# EAGLE board RFM69HCW_BOB-Panel-v10 (EAGLE 6.5.0), part 1 of 2
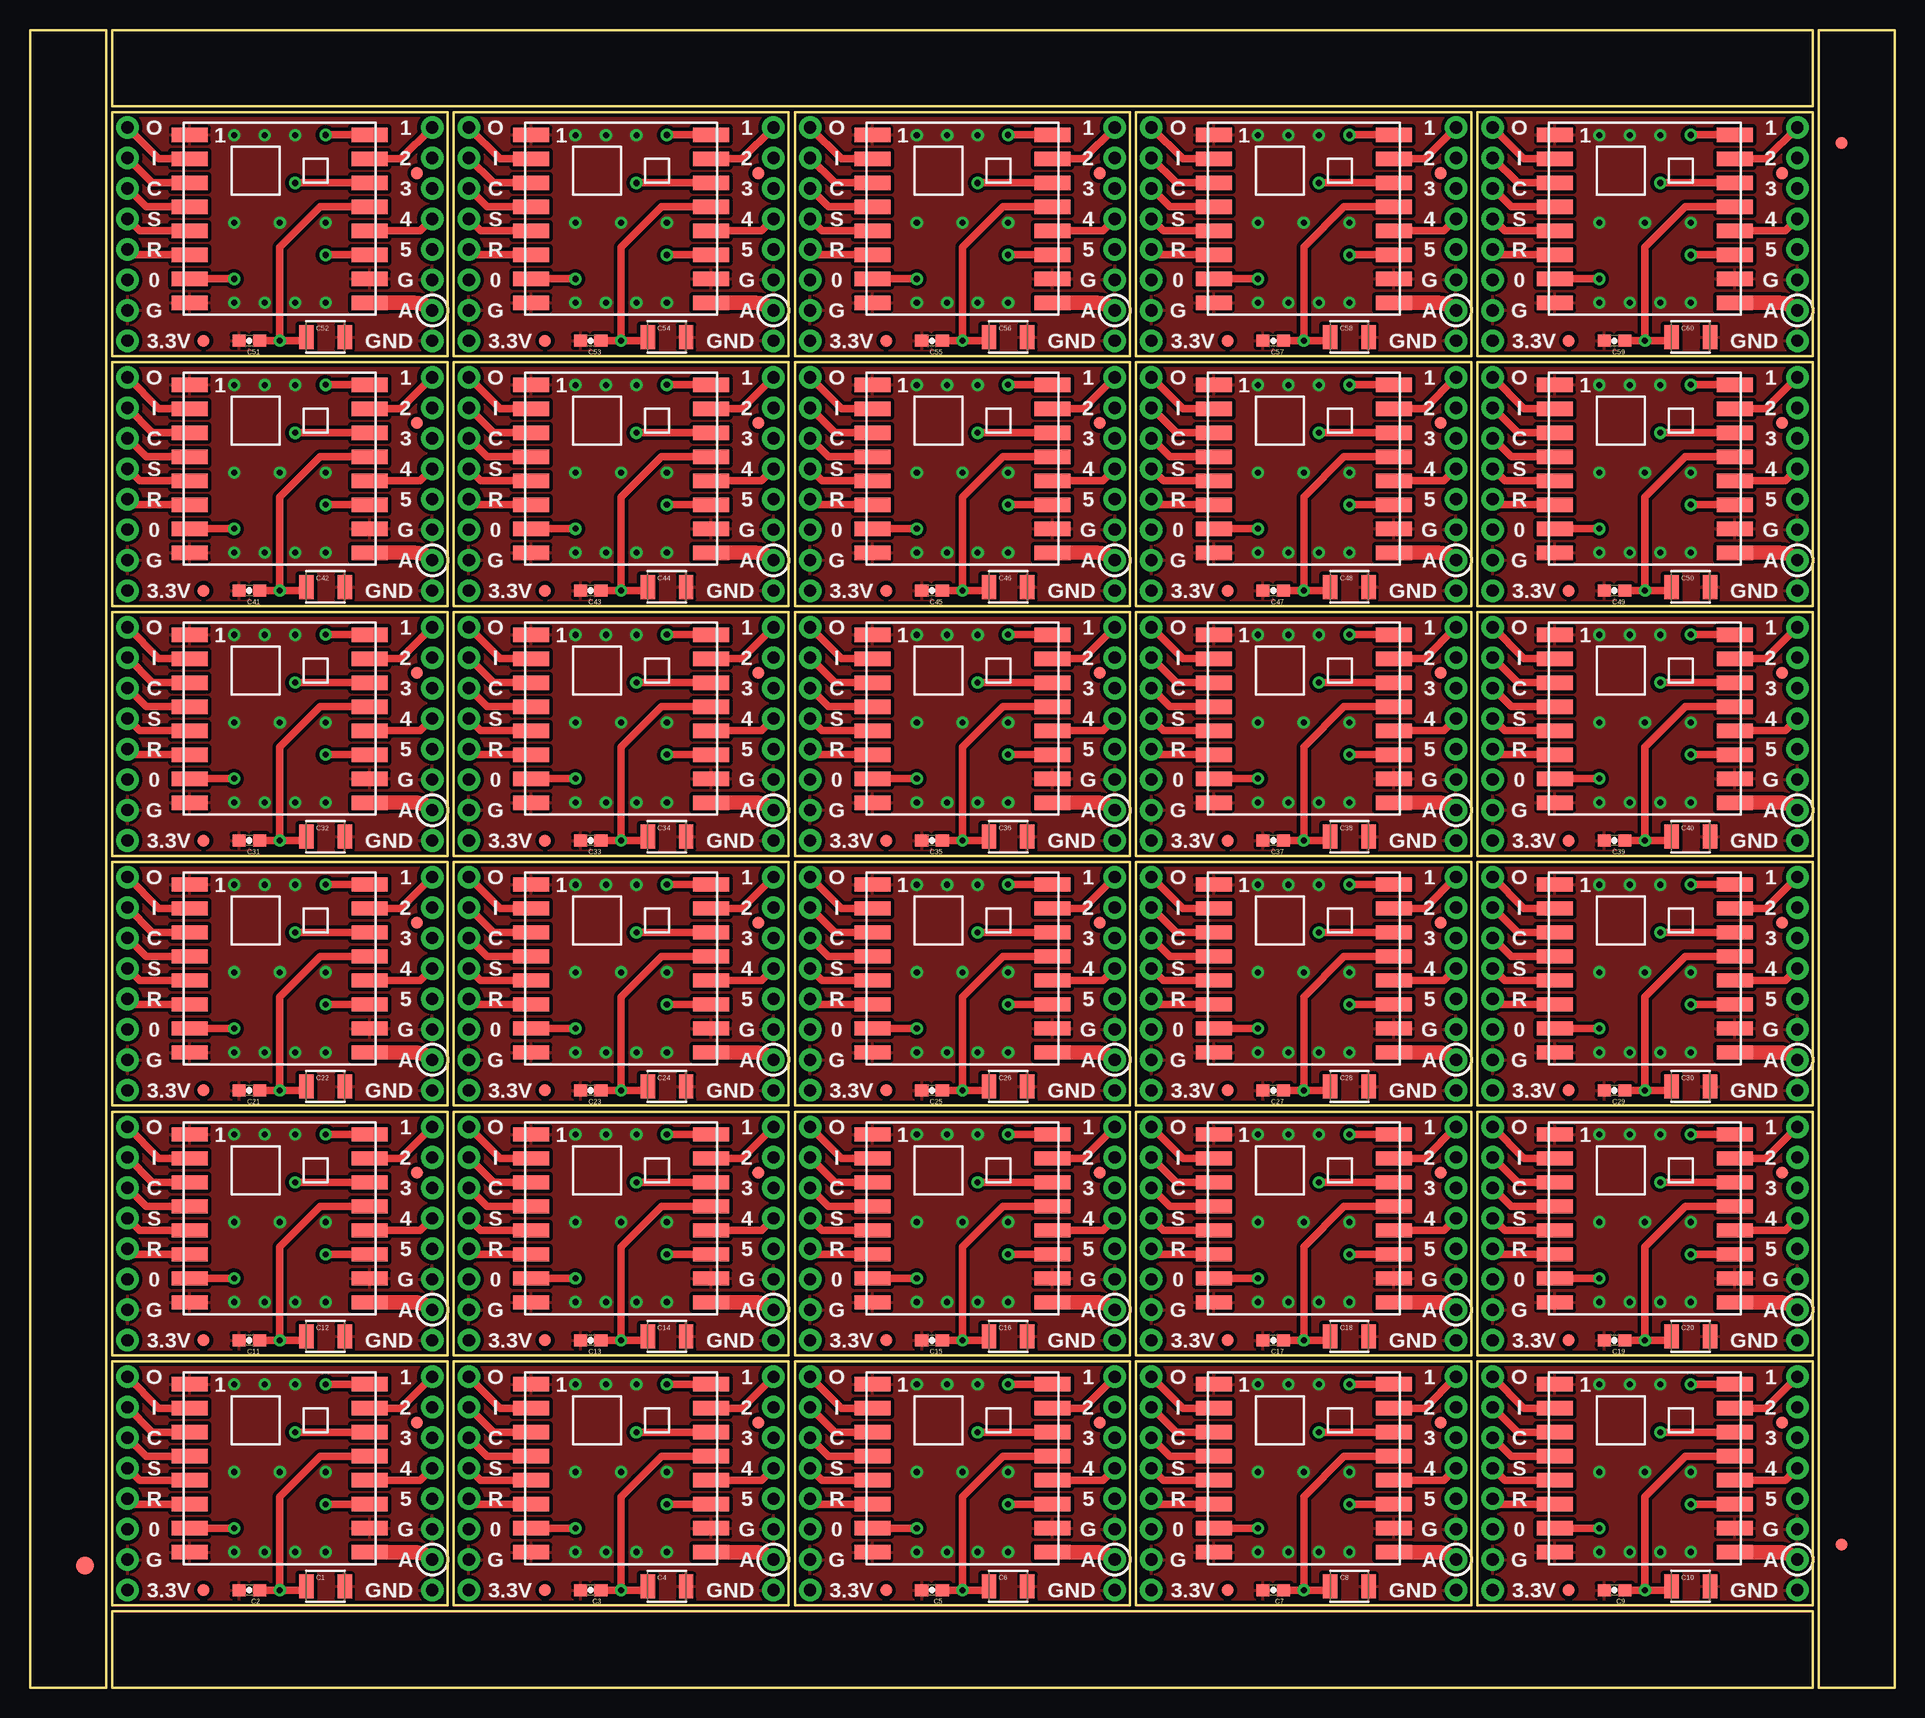
[diagram p0: board, top side]
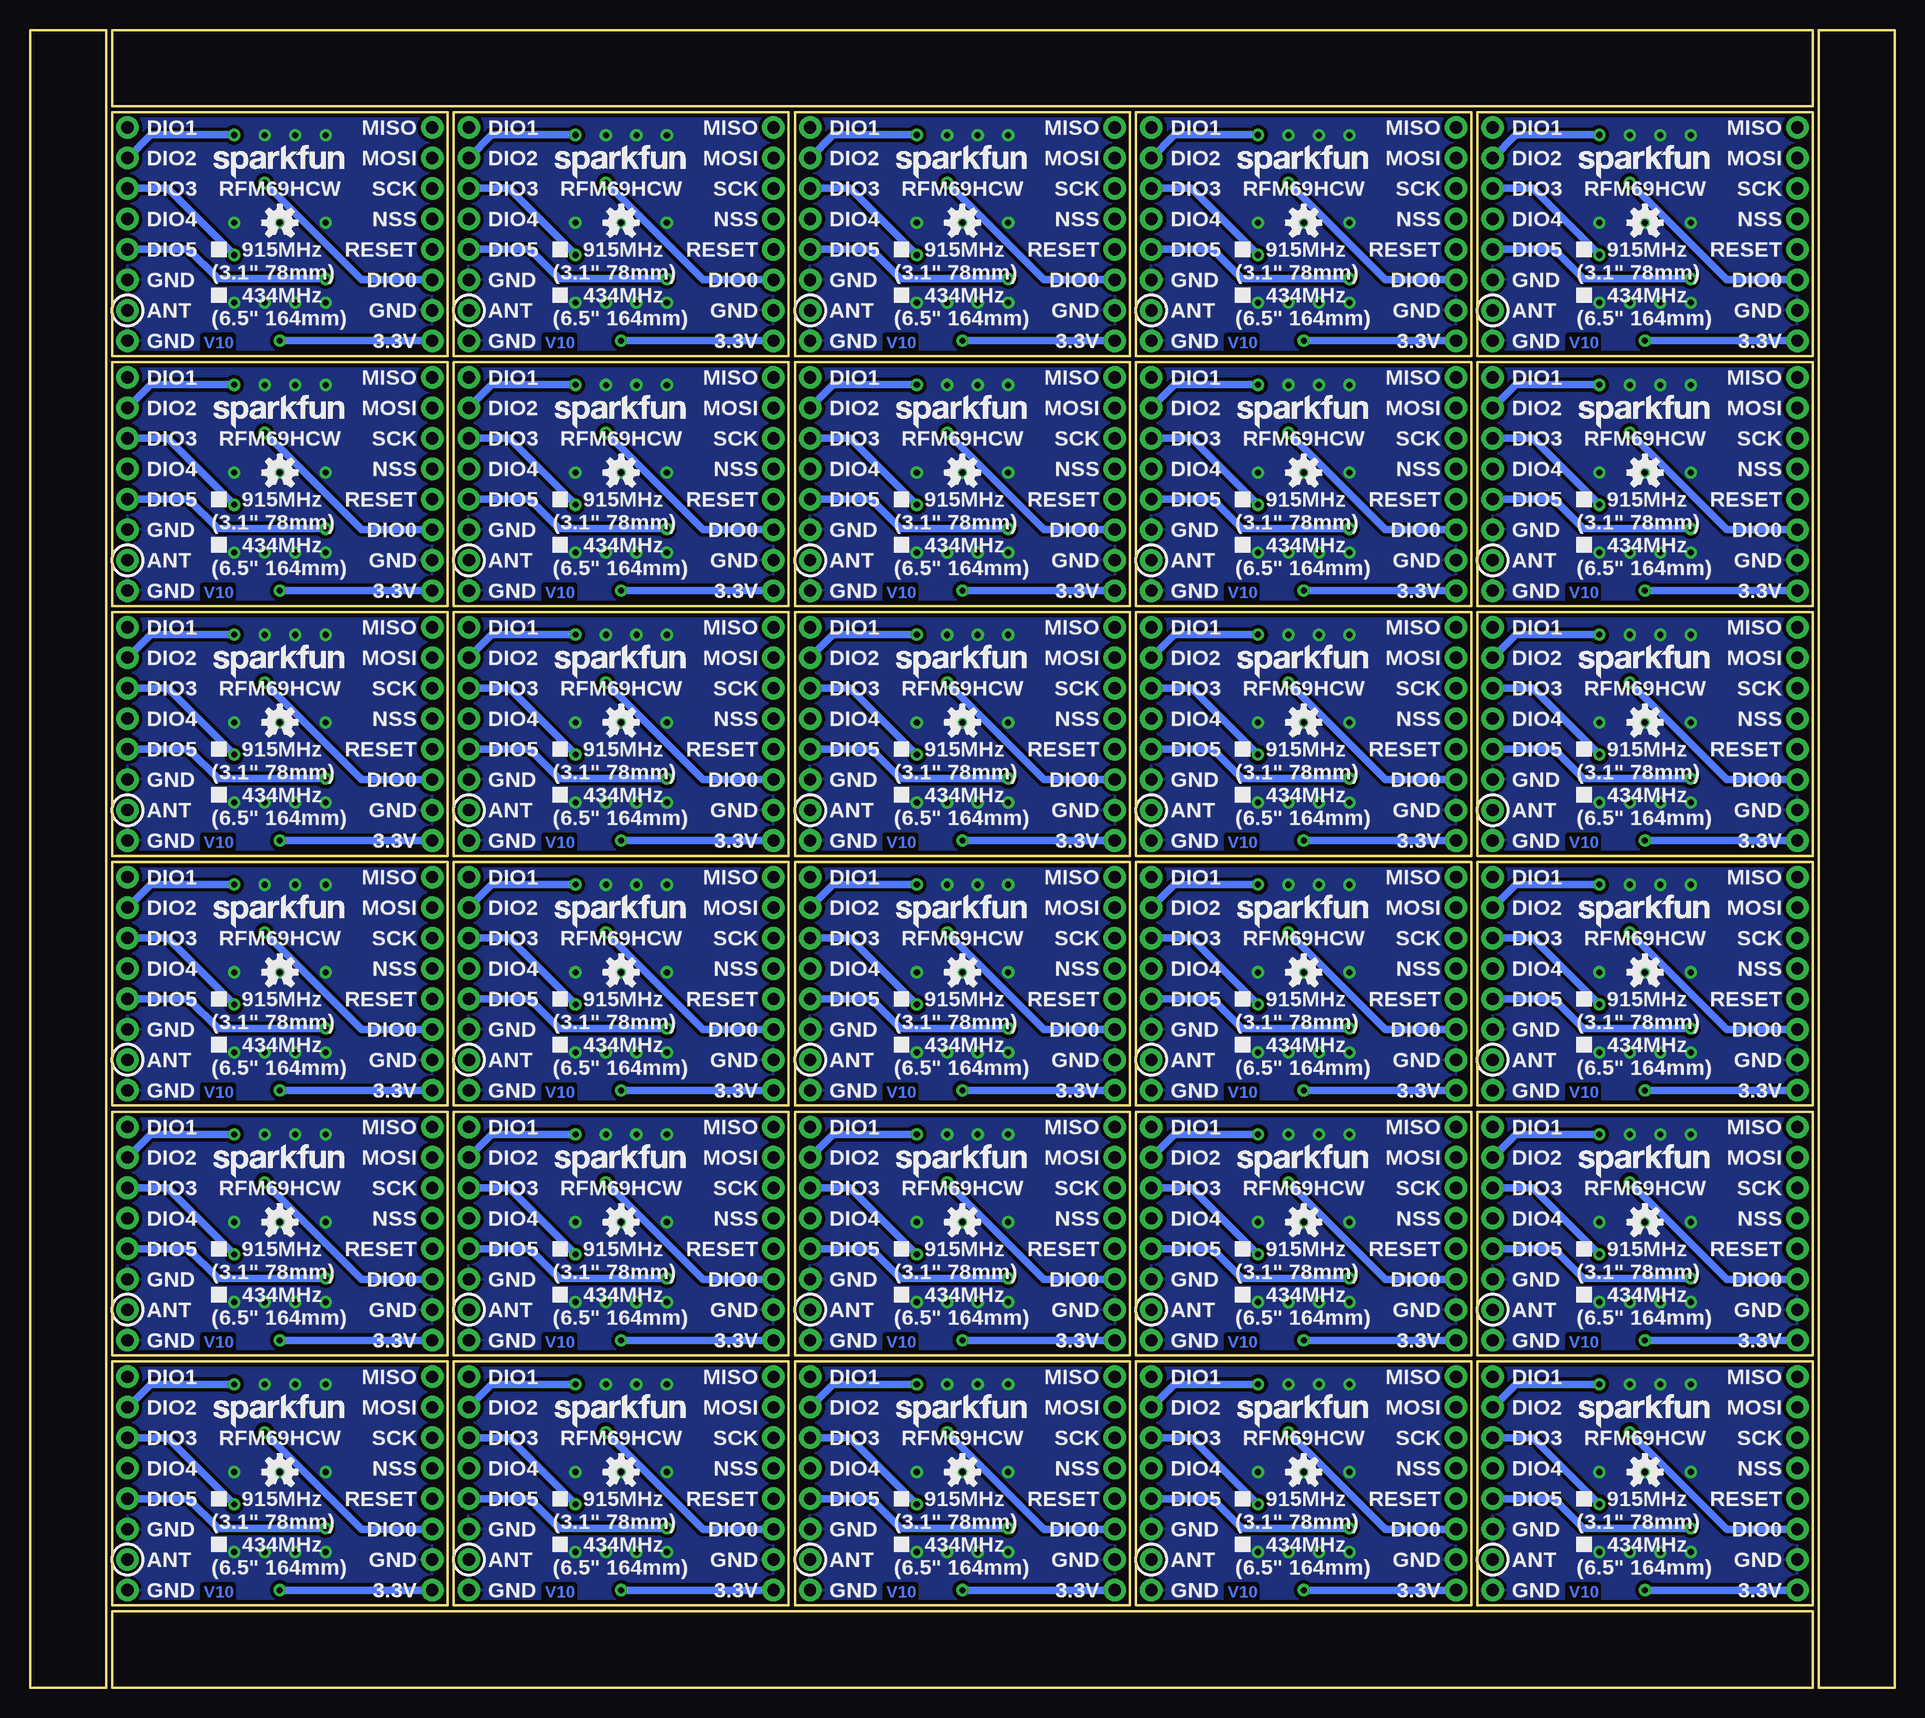
[diagram p1: board, bottom side, seen from below]

Size 155.45 x 138.18 mm. Coordinates in mm from the lower left corner, seen from the top.
Outline: 136 segments
Copper layers (1*16): Top 0.035mm / dielectric 1.5mm / Bottom 0.035mm
Design rules "SparkFun": minimum track width 7mil, minimum drill 15mil, track to track 8mil, track to pad 8mil, pad to pad 8mil, via to via 8mil, smd to smd 8mil, copper to edge 8mil, drill to drill 8mil, minimum pad ring 12mil, minimum via ring 10mil, stop-mask expansion 4mil, vias tented up to drill 20mil, thermal gap 10mil

## Footprints (pad centres in the part's own frame; a part is rotated, then mirrored left to right if it is on the bottom)
1210 = smd 1.2 x 2: 1 -1.6,0; 2 1.6,0
0603-CAP = smd 1.1 x 1: 1 -0.85,0; 2 0.85,0
FIDUCIAL-1.5X3 = smd 1.5 x 1.5: 1 0,0
FIDUCIAL-1X2 = smd 1 x 1: 1 0,0
1X02_NO_SILK = drill 1.016 pad 1.88: 1 0,0; 2 2.54,0
1X05_ROUNDONLY_NOSILK = drill 1.016 pad 1.88: 1 0,0; 2 2.54,0; 3 5.08,0; 4 7.62,0; 5 10.16,0
1X01NS = drill 1.016 pad 1.88: 1 0,0
1X03_ROUND_ONLY_NO_SILK = drill 1.016 pad 1.88: 1 0,0; 2 2.54,0; 3 5.08,0
RFM69HCW-XXXS2 = smd 3 x 1.2: 1 -7.5,7; 2 -7.5,5; 3 -7.5,3; 4 -7.5,1; 5 -7.5,-1; 6 -7.5,-3; 7 -7.5,-5; 8 -7.5,-7; 9 7.5,-7; 10 7.5,-5; 11 7.5,-3; 12 7.5,-1; 13 7.5,1; 14 7.5,3; 15 7.5,5; 16 7.5,7

## Placement (x,y rotation side)
C1  10uF  [1210]  24.64,8.45 0 top
C2  0.1uF  [0603-CAP]  18.29,8.13 180 top
C3  0.1uF  [0603-CAP]  46.74,8.13 180 top
C4  10uF  [1210]  53.09,8.45 0 top
C5  0.1uF  [0603-CAP]  75.18,8.13 180 top
C6  10uF  [1210]  81.53,8.45 0 top
C7  0.1uF  [0603-CAP]  103.63,8.13 180 top
C8  10uF  [1210]  109.98,8.45 0 top
C9  0.1uF  [0603-CAP]  132.08,8.13 180 top
C10  10uF  [1210]  138.43,8.45 0 top
C11  0.1uF  [0603-CAP]  18.29,28.96 180 top
C12  10uF  [1210]  24.64,29.27 0 top
C13  0.1uF  [0603-CAP]  46.74,28.96 180 top
C14  10uF  [1210]  53.09,29.27 0 top
C15  0.1uF  [0603-CAP]  75.18,28.96 180 top
C16  10uF  [1210]  81.53,29.27 0 top
C17  0.1uF  [0603-CAP]  103.63,28.96 180 top
C18  10uF  [1210]  109.98,29.27 0 top
C19  0.1uF  [0603-CAP]  132.08,28.96 180 top
C20  10uF  [1210]  138.43,29.27 0 top
C21  0.1uF  [0603-CAP]  18.29,49.78 180 top
C22  10uF  [1210]  24.64,50.1 0 top
C23  0.1uF  [0603-CAP]  46.74,49.78 180 top
C24  10uF  [1210]  53.09,50.1 0 top
C25  0.1uF  [0603-CAP]  75.18,49.78 180 top
C26  10uF  [1210]  81.53,50.1 0 top
C27  0.1uF  [0603-CAP]  103.63,49.78 180 top
C28  10uF  [1210]  109.98,50.1 0 top
C29  0.1uF  [0603-CAP]  132.08,49.78 180 top
C30  10uF  [1210]  138.43,50.1 0 top
C31  0.1uF  [0603-CAP]  18.29,70.61 180 top
C32  10uF  [1210]  24.64,70.93 0 top
C33  0.1uF  [0603-CAP]  46.74,70.61 180 top
C34  10uF  [1210]  53.09,70.93 0 top
C35  0.1uF  [0603-CAP]  75.18,70.61 180 top
C36  10uF  [1210]  81.53,70.93 0 top
C37  0.1uF  [0603-CAP]  103.63,70.61 180 top
C38  10uF  [1210]  109.98,70.93 0 top
C39  0.1uF  [0603-CAP]  132.08,70.61 180 top
C40  10uF  [1210]  138.43,70.93 0 top
C41  0.1uF  [0603-CAP]  18.29,91.44 180 top
C42  10uF  [1210]  24.64,91.76 0 top
C43  0.1uF  [0603-CAP]  46.74,91.44 180 top
C44  10uF  [1210]  53.09,91.76 0 top
C45  0.1uF  [0603-CAP]  75.18,91.44 180 top
C46  10uF  [1210]  81.53,91.76 0 top
C47  0.1uF  [0603-CAP]  103.63,91.44 180 top
C48  10uF  [1210]  109.98,91.76 0 top
C49  0.1uF  [0603-CAP]  132.08,91.44 180 top
C50  10uF  [1210]  138.43,91.76 0 top
C51  0.1uF  [0603-CAP]  18.29,112.27 180 top
C52  10uF  [1210]  24.64,112.59 0 top
C53  0.1uF  [0603-CAP]  46.74,112.27 180 top
C54  10uF  [1210]  53.09,112.59 0 top
C55  0.1uF  [0603-CAP]  75.18,112.27 180 top
C56  10uF  [1210]  81.53,112.59 0 top
C57  0.1uF  [0603-CAP]  103.63,112.27 180 top
C58  10uF  [1210]  109.98,112.59 0 top
C59  0.1uF  [0603-CAP]  132.08,112.27 180 top
C60  10uF  [1210]  138.43,112.59 0 top
E$1  [FIDUCIAL-1.5X3]  4.57,10.16 0 top
E$4  [FIDUCIAL-1X2]  151,11.94 0 top
E$6  [FIDUCIAL-1X2]  151,128.78 180 top
FID1  FIDUCIAL1X2  [FIDUCIAL-1X2]  14.48,8.13 0 top
FID2  FIDUCIAL1X2  [FIDUCIAL-1X2]  32.26,22.1 0 top
FID3  FIDUCIAL1X2  [FIDUCIAL-1X2]  42.93,8.13 0 top
FID4  FIDUCIAL1X2  [FIDUCIAL-1X2]  60.71,22.1 0 top
FID5  FIDUCIAL1X2  [FIDUCIAL-1X2]  71.37,8.13 0 top
FID6  FIDUCIAL1X2  [FIDUCIAL-1X2]  89.15,22.1 0 top
FID7  FIDUCIAL1X2  [FIDUCIAL-1X2]  99.82,8.13 0 top
FID8  FIDUCIAL1X2  [FIDUCIAL-1X2]  117.6,22.1 0 top
FID9  FIDUCIAL1X2  [FIDUCIAL-1X2]  128.27,8.13 0 top
FID10  FIDUCIAL1X2  [FIDUCIAL-1X2]  146.05,22.1 0 top
FID11  FIDUCIAL1X2  [FIDUCIAL-1X2]  14.48,28.96 0 top
FID12  FIDUCIAL1X2  [FIDUCIAL-1X2]  32.26,42.93 0 top
FID13  FIDUCIAL1X2  [FIDUCIAL-1X2]  42.93,28.96 0 top
FID14  FIDUCIAL1X2  [FIDUCIAL-1X2]  60.71,42.93 0 top
FID15  FIDUCIAL1X2  [FIDUCIAL-1X2]  71.37,28.96 0 top
FID16  FIDUCIAL1X2  [FIDUCIAL-1X2]  89.15,42.93 0 top
FID17  FIDUCIAL1X2  [FIDUCIAL-1X2]  99.82,28.96 0 top
FID18  FIDUCIAL1X2  [FIDUCIAL-1X2]  117.6,42.93 0 top
FID19  FIDUCIAL1X2  [FIDUCIAL-1X2]  128.27,28.96 0 top
FID20  FIDUCIAL1X2  [FIDUCIAL-1X2]  146.05,42.93 0 top
FID21  FIDUCIAL1X2  [FIDUCIAL-1X2]  14.48,49.78 0 top
FID22  FIDUCIAL1X2  [FIDUCIAL-1X2]  32.26,63.75 0 top
FID23  FIDUCIAL1X2  [FIDUCIAL-1X2]  42.93,49.78 0 top
FID24  FIDUCIAL1X2  [FIDUCIAL-1X2]  60.71,63.75 0 top
FID25  FIDUCIAL1X2  [FIDUCIAL-1X2]  71.37,49.78 0 top
FID26  FIDUCIAL1X2  [FIDUCIAL-1X2]  89.15,63.75 0 top
FID27  FIDUCIAL1X2  [FIDUCIAL-1X2]  99.82,49.78 0 top
FID28  FIDUCIAL1X2  [FIDUCIAL-1X2]  117.6,63.75 0 top
FID29  FIDUCIAL1X2  [FIDUCIAL-1X2]  128.27,49.78 0 top
FID30  FIDUCIAL1X2  [FIDUCIAL-1X2]  146.05,63.75 0 top
FID31  FIDUCIAL1X2  [FIDUCIAL-1X2]  14.48,70.61 0 top
FID32  FIDUCIAL1X2  [FIDUCIAL-1X2]  32.26,84.58 0 top
FID33  FIDUCIAL1X2  [FIDUCIAL-1X2]  42.93,70.61 0 top
FID34  FIDUCIAL1X2  [FIDUCIAL-1X2]  60.71,84.58 0 top
FID35  FIDUCIAL1X2  [FIDUCIAL-1X2]  71.37,70.61 0 top
FID36  FIDUCIAL1X2  [FIDUCIAL-1X2]  89.15,84.58 0 top
FID37  FIDUCIAL1X2  [FIDUCIAL-1X2]  99.82,70.61 0 top
FID38  FIDUCIAL1X2  [FIDUCIAL-1X2]  117.6,84.58 0 top
FID39  FIDUCIAL1X2  [FIDUCIAL-1X2]  128.27,70.61 0 top
FID40  FIDUCIAL1X2  [FIDUCIAL-1X2]  146.05,84.58 0 top
FID41  FIDUCIAL1X2  [FIDUCIAL-1X2]  14.48,91.44 0 top
FID42  FIDUCIAL1X2  [FIDUCIAL-1X2]  32.26,105.41 0 top
FID43  FIDUCIAL1X2  [FIDUCIAL-1X2]  42.93,91.44 0 top
FID44  FIDUCIAL1X2  [FIDUCIAL-1X2]  60.71,105.41 0 top
FID45  FIDUCIAL1X2  [FIDUCIAL-1X2]  71.37,91.44 0 top
FID46  FIDUCIAL1X2  [FIDUCIAL-1X2]  89.15,105.41 0 top
FID47  FIDUCIAL1X2  [FIDUCIAL-1X2]  99.82,91.44 0 top
FID48  FIDUCIAL1X2  [FIDUCIAL-1X2]  117.6,105.41 0 top
FID49  FIDUCIAL1X2  [FIDUCIAL-1X2]  128.27,91.44 0 top
FID50  FIDUCIAL1X2  [FIDUCIAL-1X2]  146.05,105.41 0 top
FID51  FIDUCIAL1X2  [FIDUCIAL-1X2]  14.48,112.27 0 top
FID52  FIDUCIAL1X2  [FIDUCIAL-1X2]  32.26,126.24 0 top
FID53  FIDUCIAL1X2  [FIDUCIAL-1X2]  42.93,112.27 0 top
FID54  FIDUCIAL1X2  [FIDUCIAL-1X2]  60.71,126.24 0 top
FID55  FIDUCIAL1X2  [FIDUCIAL-1X2]  71.37,112.27 0 top
FID56  FIDUCIAL1X2  [FIDUCIAL-1X2]  89.15,126.24 0 top
FID57  FIDUCIAL1X2  [FIDUCIAL-1X2]  99.82,112.27 0 top
FID58  FIDUCIAL1X2  [FIDUCIAL-1X2]  117.6,126.24 0 top
FID59  FIDUCIAL1X2  [FIDUCIAL-1X2]  128.27,112.27 0 top
FID60  FIDUCIAL1X2  [FIDUCIAL-1X2]  146.05,126.24 0 top
JP1  [1X02_NO_SILK]  8.13,8.13 90 top
JP2  [1X05_ROUNDONLY_NOSILK]  8.13,25.91 270 top
JP3  [1X01NS]  8.13,13.21 0 top
JP4  [1X05_ROUNDONLY_NOSILK]  33.53,25.91 270 top
JP5  ANTENNA  [1X03_ROUND_ONLY_NO_SILK]  33.53,13.21 270 top
JP6  ANTENNA  [1X03_ROUND_ONLY_NO_SILK]  61.98,13.21 270 top
JP7  [1X02_NO_SILK]  36.58,8.13 90 top
JP8  [1X05_ROUNDONLY_NOSILK]  36.58,25.91 270 top
JP9  [1X01NS]  36.58,13.21 0 top
JP10  [1X05_ROUNDONLY_NOSILK]  61.98,25.91 270 top
JP11  ANTENNA  [1X03_ROUND_ONLY_NO_SILK]  90.42,13.21 270 top
JP12  [1X02_NO_SILK]  65.02,8.13 90 top
JP13  [1X05_ROUNDONLY_NOSILK]  65.02,25.91 270 top
JP14  [1X01NS]  65.02,13.21 0 top
JP15  [1X05_ROUNDONLY_NOSILK]  90.42,25.91 270 top
JP16  ANTENNA  [1X03_ROUND_ONLY_NO_SILK]  118.87,13.21 270 top
JP17  [1X02_NO_SILK]  93.47,8.13 90 top
JP18  [1X05_ROUNDONLY_NOSILK]  93.47,25.91 270 top
JP19  [1X01NS]  93.47,13.21 0 top
JP20  [1X05_ROUNDONLY_NOSILK]  118.87,25.91 270 top
JP21  ANTENNA  [1X03_ROUND_ONLY_NO_SILK]  147.32,13.21 270 top
JP22  [1X02_NO_SILK]  121.92,8.13 90 top
JP23  [1X05_ROUNDONLY_NOSILK]  121.92,25.91 270 top
JP24  [1X01NS]  121.92,13.21 0 top
JP25  [1X05_ROUNDONLY_NOSILK]  147.32,25.91 270 top
JP26  ANTENNA  [1X03_ROUND_ONLY_NO_SILK]  33.53,34.04 270 top
JP27  [1X02_NO_SILK]  8.13,28.96 90 top
JP28  [1X05_ROUNDONLY_NOSILK]  8.13,46.74 270 top
JP29  [1X01NS]  8.13,34.04 0 top
JP30  [1X05_ROUNDONLY_NOSILK]  33.53,46.74 270 top
JP31  ANTENNA  [1X03_ROUND_ONLY_NO_SILK]  61.98,34.04 270 top
JP32  [1X02_NO_SILK]  36.58,28.96 90 top
JP33  [1X05_ROUNDONLY_NOSILK]  36.58,46.74 270 top
JP34  [1X01NS]  36.58,34.04 0 top
JP35  [1X05_ROUNDONLY_NOSILK]  61.98,46.74 270 top
JP36  ANTENNA  [1X03_ROUND_ONLY_NO_SILK]  90.42,34.04 270 top
JP37  [1X02_NO_SILK]  65.02,28.96 90 top
JP38  [1X05_ROUNDONLY_NOSILK]  65.02,46.74 270 top
JP39  [1X01NS]  65.02,34.04 0 top
JP40  [1X05_ROUNDONLY_NOSILK]  90.42,46.74 270 top
JP41  ANTENNA  [1X03_ROUND_ONLY_NO_SILK]  118.87,34.04 270 top
JP42  [1X02_NO_SILK]  93.47,28.96 90 top
JP43  [1X05_ROUNDONLY_NOSILK]  93.47,46.74 270 top
JP44  [1X01NS]  93.47,34.04 0 top
JP45  [1X05_ROUNDONLY_NOSILK]  118.87,46.74 270 top
JP46  ANTENNA  [1X03_ROUND_ONLY_NO_SILK]  147.32,34.04 270 top
JP47  [1X02_NO_SILK]  121.92,28.96 90 top
JP48  [1X05_ROUNDONLY_NOSILK]  121.92,46.74 270 top
JP49  [1X01NS]  121.92,34.04 0 top
JP50  [1X05_ROUNDONLY_NOSILK]  147.32,46.74 270 top
JP51  ANTENNA  [1X03_ROUND_ONLY_NO_SILK]  33.53,54.86 270 top
JP52  [1X02_NO_SILK]  8.13,49.78 90 top
JP53  [1X05_ROUNDONLY_NOSILK]  8.13,67.56 270 top
JP54  [1X01NS]  8.13,54.86 0 top
JP55  [1X05_ROUNDONLY_NOSILK]  33.53,67.56 270 top
JP56  ANTENNA  [1X03_ROUND_ONLY_NO_SILK]  61.98,54.86 270 top
JP57  [1X02_NO_SILK]  36.58,49.78 90 top
JP58  [1X05_ROUNDONLY_NOSILK]  36.58,67.56 270 top
JP59  [1X01NS]  36.58,54.86 0 top
JP60  [1X05_ROUNDONLY_NOSILK]  61.98,67.56 270 top
JP61  ANTENNA  [1X03_ROUND_ONLY_NO_SILK]  90.42,54.86 270 top
JP62  [1X02_NO_SILK]  65.02,49.78 90 top
JP63  [1X05_ROUNDONLY_NOSILK]  65.02,67.56 270 top
JP64  [1X01NS]  65.02,54.86 0 top
JP65  [1X05_ROUNDONLY_NOSILK]  90.42,67.56 270 top
JP66  ANTENNA  [1X03_ROUND_ONLY_NO_SILK]  118.87,54.86 270 top
JP67  [1X02_NO_SILK]  93.47,49.78 90 top
JP68  [1X05_ROUNDONLY_NOSILK]  93.47,67.56 270 top
JP69  [1X01NS]  93.47,54.86 0 top
JP70  [1X05_ROUNDONLY_NOSILK]  118.87,67.56 270 top
JP71  ANTENNA  [1X03_ROUND_ONLY_NO_SILK]  147.32,54.86 270 top
JP72  [1X02_NO_SILK]  121.92,49.78 90 top
JP73  [1X05_ROUNDONLY_NOSILK]  121.92,67.56 270 top
JP74  [1X01NS]  121.92,54.86 0 top
JP75  [1X05_ROUNDONLY_NOSILK]  147.32,67.56 270 top
JP76  ANTENNA  [1X03_ROUND_ONLY_NO_SILK]  33.53,75.69 270 top
JP77  [1X02_NO_SILK]  8.13,70.61 90 top
JP78  [1X05_ROUNDONLY_NOSILK]  8.13,88.39 270 top
JP79  [1X01NS]  8.13,75.69 0 top
JP80  [1X05_ROUNDONLY_NOSILK]  33.53,88.39 270 top
JP81  ANTENNA  [1X03_ROUND_ONLY_NO_SILK]  61.98,75.69 270 top
JP82  [1X02_NO_SILK]  36.58,70.61 90 top
JP83  [1X05_ROUNDONLY_NOSILK]  36.58,88.39 270 top
JP84  [1X01NS]  36.58,75.69 0 top
JP85  [1X05_ROUNDONLY_NOSILK]  61.98,88.39 270 top
JP86  ANTENNA  [1X03_ROUND_ONLY_NO_SILK]  90.42,75.69 270 top
JP87  [1X02_NO_SILK]  65.02,70.61 90 top
JP88  [1X05_ROUNDONLY_NOSILK]  65.02,88.39 270 top
JP89  [1X01NS]  65.02,75.69 0 top
JP90  [1X05_ROUNDONLY_NOSILK]  90.42,88.39 270 top
JP91  ANTENNA  [1X03_ROUND_ONLY_NO_SILK]  118.87,75.69 270 top
JP92  [1X02_NO_SILK]  93.47,70.61 90 top
JP93  [1X05_ROUNDONLY_NOSILK]  93.47,88.39 270 top
JP94  [1X01NS]  93.47,75.69 0 top
JP95  [1X05_ROUNDONLY_NOSILK]  118.87,88.39 270 top
JP96  ANTENNA  [1X03_ROUND_ONLY_NO_SILK]  147.32,75.69 270 top
JP97  [1X02_NO_SILK]  121.92,70.61 90 top
JP98  [1X05_ROUNDONLY_NOSILK]  121.92,88.39 270 top
JP99  [1X01NS]  121.92,75.69 0 top
JP100  [1X05_ROUNDONLY_NOSILK]  147.32,88.39 270 top
JP101  ANTENNA  [1X03_ROUND_ONLY_NO_SILK]  33.53,96.52 270 top
JP102  [1X02_NO_SILK]  8.13,91.44 90 top
JP103  [1X05_ROUNDONLY_NOSILK]  8.13,109.22 270 top
JP104  [1X01NS]  8.13,96.52 0 top
JP105  [1X05_ROUNDONLY_NOSILK]  33.53,109.22 270 top
JP106  ANTENNA  [1X03_ROUND_ONLY_NO_SILK]  61.98,96.52 270 top
JP107  [1X02_NO_SILK]  36.58,91.44 90 top
JP108  [1X05_ROUNDONLY_NOSILK]  36.58,109.22 270 top
JP109  [1X01NS]  36.58,96.52 0 top
JP110  [1X05_ROUNDONLY_NOSILK]  61.98,109.22 270 top
JP111  ANTENNA  [1X03_ROUND_ONLY_NO_SILK]  90.42,96.52 270 top
JP112  [1X02_NO_SILK]  65.02,91.44 90 top
JP113  [1X05_ROUNDONLY_NOSILK]  65.02,109.22 270 top
JP114  [1X01NS]  65.02,96.52 0 top
JP115  [1X05_ROUNDONLY_NOSILK]  90.42,109.22 270 top
JP116  ANTENNA  [1X03_ROUND_ONLY_NO_SILK]  118.87,96.52 270 top
JP117  [1X02_NO_SILK]  93.47,91.44 90 top
JP118  [1X05_ROUNDONLY_NOSILK]  93.47,109.22 270 top
JP119  [1X01NS]  93.47,96.52 0 top
JP120  [1X05_ROUNDONLY_NOSILK]  118.87,109.22 270 top
JP121  ANTENNA  [1X03_ROUND_ONLY_NO_SILK]  147.32,96.52 270 top
JP122  [1X02_NO_SILK]  121.92,91.44 90 top
JP123  [1X05_ROUNDONLY_NOSILK]  121.92,109.22 270 top
JP124  [1X01NS]  121.92,96.52 0 top
JP125  [1X05_ROUNDONLY_NOSILK]  147.32,109.22 270 top
JP126  ANTENNA  [1X03_ROUND_ONLY_NO_SILK]  33.53,117.35 270 top
JP127  [1X02_NO_SILK]  8.13,112.27 90 top
JP128  [1X05_ROUNDONLY_NOSILK]  8.13,130.05 270 top
JP129  [1X01NS]  8.13,117.35 0 top
JP130  [1X05_ROUNDONLY_NOSILK]  33.53,130.05 270 top
JP131  ANTENNA  [1X03_ROUND_ONLY_NO_SILK]  61.98,117.35 270 top
JP132  [1X02_NO_SILK]  36.58,112.27 90 top
JP133  [1X05_ROUNDONLY_NOSILK]  36.58,130.05 270 top
JP134  [1X01NS]  36.58,117.35 0 top
JP135  [1X05_ROUNDONLY_NOSILK]  61.98,130.05 270 top
JP136  ANTENNA  [1X03_ROUND_ONLY_NO_SILK]  90.42,117.35 270 top
JP137  [1X02_NO_SILK]  65.02,112.27 90 top
JP138  [1X05_ROUNDONLY_NOSILK]  65.02,130.05 270 top
JP139  [1X01NS]  65.02,117.35 0 top
JP140  [1X05_ROUNDONLY_NOSILK]  90.42,130.05 270 top
JP141  ANTENNA  [1X03_ROUND_ONLY_NO_SILK]  118.87,117.35 270 top
JP142  [1X02_NO_SILK]  93.47,112.27 90 top
JP143  [1X05_ROUNDONLY_NOSILK]  93.47,130.05 270 top
JP144  [1X01NS]  93.47,117.35 0 top
JP145  [1X05_ROUNDONLY_NOSILK]  118.87,130.05 270 top
JP146  ANTENNA  [1X03_ROUND_ONLY_NO_SILK]  147.32,117.35 270 top
JP147  [1X02_NO_SILK]  121.92,112.27 90 top
JP148  [1X05_ROUNDONLY_NOSILK]  121.92,130.05 270 top
JP149  [1X01NS]  121.92,117.35 0 top
JP150  [1X05_ROUNDONLY_NOSILK]  147.32,130.05 270 top
LOGO1  SFE_LOGO_NAME.1_INCH  [SFE_LOGO_NAME_.1]  26.86,21.15 0 bottom
LOGO2  OSHW-LOGOS  [OSHW-LOGO-S]  20.83,17.97 0 bottom
LOGO3  SFE_LOGO_NAME.1_INCH  [SFE_LOGO_NAME_.1]  55.31,21.15 0 bottom
LOGO4  OSHW-LOGOS  [OSHW-LOGO-S]  49.28,17.97 0 bottom
LOGO5  SFE_LOGO_NAME.1_INCH  [SFE_LOGO_NAME_.1]  83.76,21.15 0 bottom
LOGO6  OSHW-LOGOS  [OSHW-LOGO-S]  77.72,17.97 0 bottom
LOGO7  SFE_LOGO_NAME.1_INCH  [SFE_LOGO_NAME_.1]  112.2,21.15 0 bottom
LOGO8  OSHW-LOGOS  [OSHW-LOGO-S]  106.17,17.97 0 bottom
LOGO9  SFE_LOGO_NAME.1_INCH  [SFE_LOGO_NAME_.1]  140.65,21.15 0 bottom
LOGO10  OSHW-LOGOS  [OSHW-LOGO-S]  134.62,17.97 0 bottom
LOGO11  SFE_LOGO_NAME.1_INCH  [SFE_LOGO_NAME_.1]  26.86,41.97 0 bottom
LOGO12  OSHW-LOGOS  [OSHW-LOGO-S]  20.83,38.8 0 bottom
LOGO13  SFE_LOGO_NAME.1_INCH  [SFE_LOGO_NAME_.1]  55.31,41.97 0 bottom
LOGO14  OSHW-LOGOS  [OSHW-LOGO-S]  49.28,38.8 0 bottom
LOGO15  SFE_LOGO_NAME.1_INCH  [SFE_LOGO_NAME_.1]  83.76,41.97 0 bottom
LOGO16  OSHW-LOGOS  [OSHW-LOGO-S]  77.72,38.8 0 bottom
LOGO17  SFE_LOGO_NAME.1_INCH  [SFE_LOGO_NAME_.1]  112.2,41.97 0 bottom
LOGO18  OSHW-LOGOS  [OSHW-LOGO-S]  106.17,38.8 0 bottom
LOGO19  SFE_LOGO_NAME.1_INCH  [SFE_LOGO_NAME_.1]  140.65,41.97 0 bottom
LOGO20  OSHW-LOGOS  [OSHW-LOGO-S]  134.62,38.8 0 bottom
LOGO21  SFE_LOGO_NAME.1_INCH  [SFE_LOGO_NAME_.1]  26.86,62.8 0 bottom
LOGO22  OSHW-LOGOS  [OSHW-LOGO-S]  20.83,59.63 0 bottom
LOGO23  SFE_LOGO_NAME.1_INCH  [SFE_LOGO_NAME_.1]  55.31,62.8 0 bottom
LOGO24  OSHW-LOGOS  [OSHW-LOGO-S]  49.28,59.63 0 bottom
LOGO25  SFE_LOGO_NAME.1_INCH  [SFE_LOGO_NAME_.1]  83.76,62.8 0 bottom
LOGO26  OSHW-LOGOS  [OSHW-LOGO-S]  77.72,59.63 0 bottom
LOGO27  SFE_LOGO_NAME.1_INCH  [SFE_LOGO_NAME_.1]  112.2,62.8 0 bottom
LOGO28  OSHW-LOGOS  [OSHW-LOGO-S]  106.17,59.63 0 bottom
LOGO29  SFE_LOGO_NAME.1_INCH  [SFE_LOGO_NAME_.1]  140.65,62.8 0 bottom
LOGO30  OSHW-LOGOS  [OSHW-LOGO-S]  134.62,59.63 0 bottom
LOGO31  SFE_LOGO_NAME.1_INCH  [SFE_LOGO_NAME_.1]  26.86,83.63 0 bottom
LOGO32  OSHW-LOGOS  [OSHW-LOGO-S]  20.83,80.45 0 bottom
LOGO33  SFE_LOGO_NAME.1_INCH  [SFE_LOGO_NAME_.1]  55.31,83.63 0 bottom
LOGO34  OSHW-LOGOS  [OSHW-LOGO-S]  49.28,80.45 0 bottom
LOGO35  SFE_LOGO_NAME.1_INCH  [SFE_LOGO_NAME_.1]  83.76,83.63 0 bottom
LOGO36  OSHW-LOGOS  [OSHW-LOGO-S]  77.72,80.45 0 bottom
LOGO37  SFE_LOGO_NAME.1_INCH  [SFE_LOGO_NAME_.1]  112.2,83.63 0 bottom
LOGO38  OSHW-LOGOS  [OSHW-LOGO-S]  106.17,80.45 0 bottom
LOGO39  SFE_LOGO_NAME.1_INCH  [SFE_LOGO_NAME_.1]  140.65,83.63 0 bottom
LOGO40  OSHW-LOGOS  [OSHW-LOGO-S]  134.62,80.45 0 bottom
LOGO41  SFE_LOGO_NAME.1_INCH  [SFE_LOGO_NAME_.1]  26.86,104.46 0 bottom
LOGO42  OSHW-LOGOS  [OSHW-LOGO-S]  20.83,101.28 0 bottom
LOGO43  SFE_LOGO_NAME.1_INCH  [SFE_LOGO_NAME_.1]  55.31,104.46 0 bottom
LOGO44  OSHW-LOGOS  [OSHW-LOGO-S]  49.28,101.28 0 bottom
LOGO45  SFE_LOGO_NAME.1_INCH  [SFE_LOGO_NAME_.1]  83.76,104.46 0 bottom
LOGO46  OSHW-LOGOS  [OSHW-LOGO-S]  77.72,101.28 0 bottom
LOGO47  SFE_LOGO_NAME.1_INCH  [SFE_LOGO_NAME_.1]  112.2,104.46 0 bottom
LOGO48  OSHW-LOGOS  [OSHW-LOGO-S]  106.17,101.28 0 bottom
LOGO49  SFE_LOGO_NAME.1_INCH  [SFE_LOGO_NAME_.1]  140.65,104.46 0 bottom
LOGO50  OSHW-LOGOS  [OSHW-LOGO-S]  134.62,101.28 0 bottom
LOGO51  SFE_LOGO_NAME.1_INCH  [SFE_LOGO_NAME_.1]  26.86,125.29 0 bottom
LOGO52  OSHW-LOGOS  [OSHW-LOGO-S]  20.83,122.11 0 bottom
LOGO53  SFE_LOGO_NAME.1_INCH  [SFE_LOGO_NAME_.1]  55.31,125.29 0 bottom
LOGO54  OSHW-LOGOS  [OSHW-LOGO-S]  49.28,122.11 0 bottom
LOGO55  SFE_LOGO_NAME.1_INCH  [SFE_LOGO_NAME_.1]  83.76,125.29 0 bottom
LOGO56  OSHW-LOGOS  [OSHW-LOGO-S]  77.72,122.11 0 bottom
LOGO57  SFE_LOGO_NAME.1_INCH  [SFE_LOGO_NAME_.1]  112.2,125.29 0 bottom
LOGO58  OSHW-LOGOS  [OSHW-LOGO-S]  106.17,122.11 0 bottom
LOGO59  SFE_LOGO_NAME.1_INCH  [SFE_LOGO_NAME_.1]  140.65,125.29 0 bottom
LOGO60  OSHW-LOGOS  [OSHW-LOGO-S]  134.62,122.11 0 bottom
U1  RFM69HCW  [RFM69HCW-XXXS2]  20.83,18.29 0 top
U2  RFM69HCW  [RFM69HCW-XXXS2]  49.28,18.29 0 top
U3  RFM69HCW  [RFM69HCW-XXXS2]  77.72,18.29 0 top
U4  RFM69HCW  [RFM69HCW-XXXS2]  106.17,18.29 0 top
U5  RFM69HCW  [RFM69HCW-XXXS2]  134.62,18.29 0 top
U6  RFM69HCW  [RFM69HCW-XXXS2]  20.83,39.12 0 top
U7  RFM69HCW  [RFM69HCW-XXXS2]  49.28,39.12 0 top
U8  RFM69HCW  [RFM69HCW-XXXS2]  77.72,39.12 0 top
U9  RFM69HCW  [RFM69HCW-XXXS2]  106.17,39.12 0 top
U10  RFM69HCW  [RFM69HCW-XXXS2]  134.62,39.12 0 top
U11  RFM69HCW  [RFM69HCW-XXXS2]  20.83,59.94 0 top
U12  RFM69HCW  [RFM69HCW-XXXS2]  49.28,59.94 0 top
U13  RFM69HCW  [RFM69HCW-XXXS2]  77.72,59.94 0 top
U14  RFM69HCW  [RFM69HCW-XXXS2]  106.17,59.94 0 top
U15  RFM69HCW  [RFM69HCW-XXXS2]  134.62,59.94 0 top
U16  RFM69HCW  [RFM69HCW-XXXS2]  20.83,80.77 0 top
U17  RFM69HCW  [RFM69HCW-XXXS2]  49.28,80.77 0 top
U18  RFM69HCW  [RFM69HCW-XXXS2]  77.72,80.77 0 top
U19  RFM69HCW  [RFM69HCW-XXXS2]  106.17,80.77 0 top
U20  RFM69HCW  [RFM69HCW-XXXS2]  134.62,80.77 0 top
U21  RFM69HCW  [RFM69HCW-XXXS2]  20.83,101.6 0 top
U22  RFM69HCW  [RFM69HCW-XXXS2]  49.28,101.6 0 top
U23  RFM69HCW  [RFM69HCW-XXXS2]  77.72,101.6 0 top
U24  RFM69HCW  [RFM69HCW-XXXS2]  106.17,101.6 0 top
U25  RFM69HCW  [RFM69HCW-XXXS2]  134.62,101.6 0 top
U26  RFM69HCW  [RFM69HCW-XXXS2]  20.83,122.43 0 top
U27  RFM69HCW  [RFM69HCW-XXXS2]  49.28,122.43 0 top
U28  RFM69HCW  [RFM69HCW-XXXS2]  77.72,122.43 0 top
U29  RFM69HCW  [RFM69HCW-XXXS2]  106.17,122.43 0 top
U30  RFM69HCW  [RFM69HCW-XXXS2]  134.62,122.43 0 top

## Library data of the parts
C1 C4 C6 C8 C10 C12 C14 C16 C18 C20 C22 C24 C26 C28 C30 C32 C34 C36 C38 C40 C42 C44 C46 C48 C50 C52 C54 C56 C58 C60 = SparkFun-Capacitors; PROD_ID: CAP-09824
C2 C3 C5 C7 C9 C11 C13 C15 C17 C19 C21 C23 C25 C27 C29 C31 C33 C35 C37 C39 C41 C43 C45 C47 C49 C51 C53 C55 C57 C59 = SparkFun-Capacitors; PROD_ID: CAP-00810
E$1 = SparkFun-Retired
E$4 E$6 FID1-FID60 LOGO1-LOGO60 = SparkFun-Aesthetics
JP1-JP150 U1-U30 = mike-temp

## Nets
3.3V: C1.1 C2.1 JP1.1 U1.13
3.3V1: C3.1 C4.1 JP7.1 U2.13
3.3V2: C5.1 C6.1 JP12.1 U3.13
3.3V3: C7.1 C8.1 JP17.1 U4.13
3.3V4: C9.1 C10.1 JP22.1 U5.13
3.3V5: C11.1 C12.1 JP27.1 U6.13
3.3V6: C13.1 C14.1 JP32.1 U7.13
3.3V7: C15.1 C16.1 JP37.1 U8.13
3.3V8: C17.1 C18.1 JP42.1 U9.13
3.3V9: C19.1 C20.1 JP47.1 U10.13
3.3V10: C21.1 C22.1 JP52.1 U11.13
3.3V11: C23.1 C24.1 JP57.1 U12.13
3.3V12: C25.1 C26.1 JP62.1 U13.13
3.3V13: C27.1 C28.1 JP67.1 U14.13
3.3V14: C29.1 C30.1 JP72.1 U15.13
3.3V15: C31.1 C32.1 JP77.1 U16.13
3.3V16: C33.1 C34.1 JP82.1 U17.13
3.3V17: C35.1 C36.1 JP87.1 U18.13
3.3V18: C37.1 C38.1 JP92.1 U19.13
3.3V19: C39.1 C40.1 JP97.1 U20.13
3.3V20: C41.1 C42.1 JP102.1 U21.13
3.3V21: C43.1 C44.1 JP107.1 U22.13
3.3V22: C45.1 C46.1 JP112.1 U23.13
3.3V23: C47.1 C48.1 JP117.1 U24.13
3.3V24: C49.1 C50.1 JP122.1 U25.13
3.3V25: C51.1 C52.1 JP127.1 U26.13
3.3V26: C53.1 C54.1 JP132.1 U27.13
3.3V27: C55.1 C56.1 JP137.1 U28.13
3.3V28: C57.1 C58.1 JP142.1 U29.13
3.3V29: C59.1 C60.1 JP147.1 U30.13
ANT: JP5.2 U1.9
ANT1: JP6.2 U2.9
ANT2: JP11.2 U3.9
ANT3: JP16.2 U4.9
ANT4: JP21.2 U5.9
ANT5: JP26.2 U6.9
ANT6: JP31.2 U7.9
ANT7: JP36.2 U8.9
ANT8: JP41.2 U9.9
ANT9: JP46.2 U10.9
ANT10: JP51.2 U11.9
ANT11: JP56.2 U12.9
ANT12: JP61.2 U13.9
ANT13: JP66.2 U14.9
ANT14: JP71.2 U15.9
ANT15: JP76.2 U16.9
ANT16: JP81.2 U17.9
ANT17: JP86.2 U18.9
ANT18: JP91.2 U19.9
ANT19: JP96.2 U20.9
ANT20: JP101.2 U21.9
ANT21: JP106.2 U22.9
ANT22: JP111.2 U23.9
ANT23: JP116.2 U24.9
ANT24: JP121.2 U25.9
ANT25: JP126.2 U26.9
ANT26: JP131.2 U27.9
ANT27: JP136.2 U28.9
ANT28: JP141.2 U29.9
ANT29: JP146.2 U30.9
DIO0: JP3.1 U1.14
DIO1: JP4.1 U1.15
DIO2: JP4.2 U1.16
DIO3: JP4.3 U1.11
DIO4: JP4.4 U1.12
DIO5: JP4.5 U1.7
DIO6: JP9.1 U2.14
DIO7: JP10.1 U2.15
DIO8: JP10.2 U2.16
DIO9: JP10.3 U2.11
DIO10: JP10.5 U2.7
DIO11: JP10.4 U2.12
DIO12: JP14.1 U3.14
DIO13: JP15.1 U3.15
DIO14: JP15.2 U3.16
DIO15: JP15.3 U3.11
DIO16: JP15.5 U3.7
DIO17: JP15.4 U3.12
DIO18: JP19.1 U4.14
DIO19: JP20.1 U4.15
DIO20: JP20.2 U4.16
DIO21: JP20.3 U4.11
DIO22: JP20.5 U4.7
DIO23: JP20.4 U4.12
DIO24: JP24.1 U5.14
DIO25: JP25.1 U5.15
DIO26: JP25.2 U5.16
DIO27: JP25.3 U5.11
DIO28: JP25.5 U5.7
DIO29: JP25.4 U5.12
DIO30: JP29.1 U6.14
DIO31: JP30.1 U6.15
DIO32: JP30.2 U6.16
DIO33: JP30.3 U6.11
DIO34: JP30.5 U6.7
DIO35: JP30.4 U6.12
DIO36: JP34.1 U7.14
DIO37: JP35.1 U7.15
DIO38: JP35.2 U7.16
DIO39: JP35.3 U7.11
DIO40: JP35.5 U7.7
DIO41: JP35.4 U7.12
DIO42: JP39.1 U8.14
DIO43: JP40.1 U8.15
DIO44: JP40.2 U8.16
DIO45: JP40.3 U8.11
DIO46: JP40.5 U8.7
DIO47: JP40.4 U8.12
DIO48: JP44.1 U9.14
DIO49: JP45.1 U9.15
DIO50: JP45.2 U9.16
DIO51: JP45.3 U9.11
DIO52: JP45.5 U9.7
DIO53: JP45.4 U9.12
DIO54: JP49.1 U10.14
DIO55: JP50.1 U10.15
DIO56: JP50.2 U10.16
DIO57: JP50.3 U10.11
DIO58: JP50.5 U10.7
DIO59: JP50.4 U10.12
DIO60: JP54.1 U11.14
DIO61: JP55.1 U11.15
DIO62: JP55.2 U11.16
DIO63: JP55.3 U11.11
DIO64: JP55.5 U11.7
DIO65: JP55.4 U11.12
DIO66: JP59.1 U12.14
DIO67: JP60.1 U12.15
DIO68: JP60.2 U12.16
DIO69: JP60.3 U12.11
DIO70: JP60.5 U12.7
DIO71: JP60.4 U12.12
DIO72: JP64.1 U13.14
DIO73: JP65.1 U13.15
DIO74: JP65.2 U13.16
DIO75: JP65.3 U13.11
DIO76: JP65.5 U13.7
DIO77: JP65.4 U13.12
DIO78: JP69.1 U14.14
DIO79: JP70.1 U14.15
DIO80: JP70.2 U14.16
DIO81: JP70.3 U14.11
DIO82: JP70.5 U14.7
DIO83: JP70.4 U14.12
DIO84: JP74.1 U15.14
DIO85: JP75.1 U15.15
DIO86: JP75.2 U15.16
DIO87: JP75.3 U15.11
DIO88: JP75.5 U15.7
DIO89: JP75.4 U15.12
DIO90: JP79.1 U16.14
DIO91: JP80.1 U16.15
DIO92: JP80.2 U16.16
DIO93: JP80.3 U16.11
DIO94: JP80.5 U16.7
DIO95: JP80.4 U16.12
DIO96: JP84.1 U17.14
DIO97: JP85.1 U17.15
DIO98: JP85.2 U17.16
DIO99: JP85.3 U17.11
DIO100: JP85.5 U17.7
DIO101: JP85.4 U17.12
DIO102: JP89.1 U18.14
DIO103: JP90.1 U18.15
DIO104: JP90.2 U18.16
DIO105: JP90.3 U18.11
DIO106: JP90.5 U18.7
DIO107: JP90.4 U18.12
DIO108: JP94.1 U19.14
DIO109: JP95.1 U19.15
DIO110: JP95.2 U19.16
DIO111: JP95.3 U19.11
DIO112: JP95.5 U19.7
DIO113: JP95.4 U19.12
DIO114: JP99.1 U20.14
DIO115: JP100.1 U20.15
DIO116: JP100.2 U20.16
DIO117: JP100.3 U20.11
DIO118: JP100.5 U20.7
DIO119: JP100.4 U20.12
DIO120: JP104.1 U21.14
DIO121: JP105.1 U21.15
DIO122: JP105.2 U21.16
DIO123: JP105.3 U21.11
DIO124: JP105.5 U21.7
DIO125: JP105.4 U21.12
DIO126: JP109.1 U22.14
DIO127: JP110.1 U22.15
DIO128: JP110.2 U22.16
DIO129: JP110.3 U22.11
DIO130: JP110.5 U22.7
DIO131: JP110.4 U22.12
DIO132: JP114.1 U23.14
DIO133: JP115.1 U23.15
DIO134: JP115.2 U23.16
DIO135: JP115.3 U23.11
DIO136: JP115.5 U23.7
DIO137: JP115.4 U23.12
DIO138: JP119.1 U24.14
DIO139: JP120.1 U24.15
DIO140: JP120.2 U24.16
DIO141: JP120.3 U24.11
DIO142: JP120.5 U24.7
DIO143: JP120.4 U24.12
DIO144: JP124.1 U25.14
DIO145: JP125.1 U25.15
DIO146: JP125.2 U25.16
DIO147: JP125.3 U25.11
DIO148: JP125.5 U25.7
DIO149: JP125.4 U25.12
DIO150: JP129.1 U26.14
DIO151: JP130.1 U26.15
DIO152: JP130.2 U26.16
DIO153: JP130.3 U26.11
DIO154: JP130.5 U26.7
DIO155: JP130.4 U26.12
DIO156: JP134.1 U27.14
DIO157: JP135.1 U27.15
DIO158: JP135.2 U27.16
DIO159: JP135.3 U27.11
DIO160: JP135.5 U27.7
DIO161: JP135.4 U27.12
DIO162: JP139.1 U28.14
DIO163: JP140.1 U28.15
DIO164: JP140.2 U28.16
DIO165: JP140.3 U28.11
DIO166: JP140.5 U28.7
DIO167: JP140.4 U28.12
DIO168: JP144.1 U29.14
DIO169: JP145.1 U29.15
DIO170: JP145.2 U29.16
DIO171: JP145.3 U29.11
DIO172: JP145.5 U29.7
DIO173: JP145.4 U29.12
DIO174: JP149.1 U30.14
DIO175: JP150.1 U30.15
DIO176: JP150.2 U30.16
DIO177: JP150.3 U30.11
DIO178: JP150.5 U30.7
DIO179: JP150.4 U30.12
GND: C1.2 C2.2 JP1.2 JP5.1 JP5.3 U1.1 U1.8 U1.10
GND1: C3.2 C4.2 JP6.1 JP6.3 JP7.2 U2.1 U2.8 U2.10
GND2: C5.2 C6.2 JP11.1 JP11.3 JP12.2 U3.1 U3.8 U3.10
GND3: C7.2 C8.2 JP16.1 JP16.3 JP17.2 U4.1 U4.8 U4.10
GND4: C9.2 C10.2 JP21.1 JP21.3 JP22.2 U5.1 U5.8 U5.10
GND5: C11.2 C12.2 JP26.1 JP26.3 JP27.2 U6.1 U6.8 U6.10
GND6: C13.2 C14.2 JP31.1 JP31.3 JP32.2 U7.1 U7.8 U7.10
GND7: C15.2 C16.2 JP36.1 JP36.3 JP37.2 U8.1 U8.8 U8.10
GND8: C17.2 C18.2 JP41.1 JP41.3 JP42.2 U9.1 U9.8 U9.10
GND9: C19.2 C20.2 JP46.1 JP46.3 JP47.2 U10.1 U10.8 U10.10
GND10: C21.2 C22.2 JP51.1 JP51.3 JP52.2 U11.1 U11.8 U11.10
GND11: C23.2 C24.2 JP56.1 JP56.3 JP57.2 U12.1 U12.8 U12.10
GND12: C25.2 C26.2 JP61.1 JP61.3 JP62.2 U13.1 U13.8 U13.10
GND13: C27.2 C28.2 JP66.1 JP66.3 JP67.2 U14.1 U14.8 U14.10
GND14: C29.2 C30.2 JP71.1 JP71.3 JP72.2 U15.1 U15.8 U15.10
GND15: C31.2 C32.2 JP76.1 JP76.3 JP77.2 U16.1 U16.8 U16.10
GND16: C33.2 C34.2 JP81.1 JP81.3 JP82.2 U17.1 U17.8 U17.10
GND17: C35.2 C36.2 JP86.1 JP86.3 JP87.2 U18.1 U18.8 U18.10
GND18: C37.2 C38.2 JP91.1 JP91.3 JP92.2 U19.1 U19.8 U19.10
GND19: C39.2 C40.2 JP96.1 JP96.3 JP97.2 U20.1 U20.8 U20.10
GND20: C41.2 C42.2 JP101.1 JP101.3 JP102.2 U21.1 U21.8 U21.10
GND21: C43.2 C44.2 JP106.1 JP106.3 JP107.2 U22.1 U22.8 U22.10
GND22: C45.2 C46.2 JP111.1 JP111.3 JP112.2 U23.1 U23.8 U23.10
GND23: C47.2 C48.2 JP116.1 JP116.3 JP117.2 U24.1 U24.8 U24.10
GND24: C49.2 C50.2 JP121.1 JP121.3 JP122.2 U25.1 U25.8 U25.10
GND25: C51.2 C52.2 JP126.1 JP126.3 JP127.2 U26.1 U26.8 U26.10
GND26: C53.2 C54.2 JP131.1 JP131.3 JP132.2 U27.1 U27.8 U27.10
GND27: C55.2 C56.2 JP136.1 JP136.3 JP137.2 U28.1 U28.8 U28.10
GND28: C57.2 C58.2 JP141.1 JP141.3 JP142.2 U29.1 U29.8 U29.10
GND29: C59.2 C60.2 JP146.1 JP146.3 JP147.2 U30.1 U30.8 U30.10
MISO: JP2.1 U1.2
MISO1: JP8.1 U2.2
MISO2: JP13.1 U3.2
MISO3: JP18.1 U4.2
MISO4: JP23.1 U5.2
MISO5: JP28.1 U6.2
MISO6: JP33.1 U7.2
MISO7: JP38.1 U8.2
MISO8: JP43.1 U9.2
MISO9: JP48.1 U10.2
MISO10: JP53.1 U11.2
MISO11: JP58.1 U12.2
MISO12: JP63.1 U13.2
MISO13: JP68.1 U14.2
MISO14: JP73.1 U15.2
MISO15: JP78.1 U16.2
MISO16: JP83.1 U17.2
MISO17: JP88.1 U18.2
MISO18: JP93.1 U19.2
MISO19: JP98.1 U20.2
MISO20: JP103.1 U21.2
MISO21: JP108.1 U22.2
MISO22: JP113.1 U23.2
MISO23: JP118.1 U24.2
MISO24: JP123.1 U25.2
MISO25: JP128.1 U26.2
MISO26: JP133.1 U27.2
MISO27: JP138.1 U28.2
MISO28: JP143.1 U29.2
MISO29: JP148.1 U30.2
MOSI: JP2.2 U1.3
MOSI1: JP8.2 U2.3
MOSI2: JP13.2 U3.3
MOSI3: JP18.2 U4.3
MOSI4: JP23.2 U5.3
MOSI5: JP28.2 U6.3
MOSI6: JP33.2 U7.3
MOSI7: JP38.2 U8.3
MOSI8: JP43.2 U9.3
MOSI9: JP48.2 U10.3
MOSI10: JP53.2 U11.3
MOSI11: JP58.2 U12.3
MOSI12: JP63.2 U13.3
MOSI13: JP68.2 U14.3
MOSI14: JP73.2 U15.3
MOSI15: JP78.2 U16.3
MOSI16: JP83.2 U17.3
MOSI17: JP88.2 U18.3
MOSI18: JP93.2 U19.3
MOSI19: JP98.2 U20.3
MOSI20: JP103.2 U21.3
MOSI21: JP108.2 U22.3
MOSI22: JP113.2 U23.3
MOSI23: JP118.2 U24.3
MOSI24: JP123.2 U25.3
MOSI25: JP128.2 U26.3
MOSI26: JP133.2 U27.3
MOSI27: JP138.2 U28.3
MOSI28: JP143.2 U29.3
MOSI29: JP148.2 U30.3
NSS: JP2.4 U1.5
NSS1: JP8.4 U2.5
NSS2: JP13.4 U3.5
NSS3: JP18.4 U4.5
NSS4: JP23.4 U5.5
NSS5: JP28.4 U6.5
NSS6: JP33.4 U7.5
NSS7: JP38.4 U8.5
NSS8: JP43.4 U9.5
NSS9: JP48.4 U10.5
NSS10: JP53.4 U11.5
NSS11: JP58.4 U12.5
NSS12: JP63.4 U13.5
NSS13: JP68.4 U14.5
NSS14: JP73.4 U15.5
NSS15: JP78.4 U16.5
NSS16: JP83.4 U17.5
NSS17: JP88.4 U18.5
NSS18: JP93.4 U19.5
NSS19: JP98.4 U20.5
NSS20: JP103.4 U21.5
NSS21: JP108.4 U22.5
NSS22: JP113.4 U23.5
NSS23: JP118.4 U24.5
NSS24: JP123.4 U25.5
NSS25: JP128.4 U26.5
NSS26: JP133.4 U27.5
NSS27: JP138.4 U28.5
NSS28: JP143.4 U29.5
NSS29: JP148.4 U30.5
RESET: JP2.5 U1.6
RESET1: JP8.5 U2.6
RESET2: JP13.5 U3.6
RESET3: JP18.5 U4.6
RESET4: JP23.5 U5.6
RESET5: JP28.5 U6.6
RESET6: JP33.5 U7.6
RESET7: JP38.5 U8.6
RESET8: JP43.5 U9.6
RESET9: JP48.5 U10.6
RESET10: JP53.5 U11.6
RESET11: JP58.5 U12.6
RESET12: JP63.5 U13.6
RESET13: JP68.5 U14.6
RESET14: JP73.5 U15.6
RESET15: JP78.5 U16.6
RESET16: JP83.5 U17.6
RESET17: JP88.5 U18.6
RESET18: JP93.5 U19.6
RESET19: JP98.5 U20.6
RESET20: JP103.5 U21.6
RESET21: JP108.5 U22.6
RESET22: JP113.5 U23.6
RESET23: JP118.5 U24.6
RESET24: JP123.5 U25.6
RESET25: JP128.5 U26.6
RESET26: JP133.5 U27.6
RESET27: JP138.5 U28.6
RESET28: JP143.5 U29.6
RESET29: JP148.5 U30.6
SCK: JP2.3 U1.4
SCK1: JP8.3 U2.4
SCK2: JP13.3 U3.4
SCK3: JP18.3 U4.4
SCK4: JP23.3 U5.4
SCK5: JP28.3 U6.4
SCK6: JP33.3 U7.4
SCK7: JP38.3 U8.4
SCK8: JP43.3 U9.4
SCK9: JP48.3 U10.4
SCK10: JP53.3 U11.4
SCK11: JP58.3 U12.4
SCK12: JP63.3 U13.4
SCK13: JP68.3 U14.4
SCK14: JP73.3 U15.4
SCK15: JP78.3 U16.4
SCK16: JP83.3 U17.4
SCK17: JP88.3 U18.4
SCK18: JP93.3 U19.4
SCK19: JP98.3 U20.4
SCK20: JP103.3 U21.4
SCK21: JP108.3 U22.4
SCK22: JP113.3 U23.4
SCK23: JP118.3 U24.4
SCK24: JP123.3 U25.4
SCK25: JP128.3 U26.4
SCK26: JP133.3 U27.4
SCK27: JP138.3 U28.4
SCK28: JP143.3 U29.4
SCK29: JP148.3 U30.4